# Altium PCB JacdacBrainESP32 48.PcbDoc (part 1 of 3)
Units mm, origin at the board's own origin, x right, y up, seen from the top; angles counter-clockwise.
Board outline 34 x 42.68 mm, 2 copper layers (Top Layer, Bottom Layer), stack 1.525 mm thick; 80 components, 57 nets, 295 pads, 72 vias.
Unrouted connection lines stored in the file: 49.
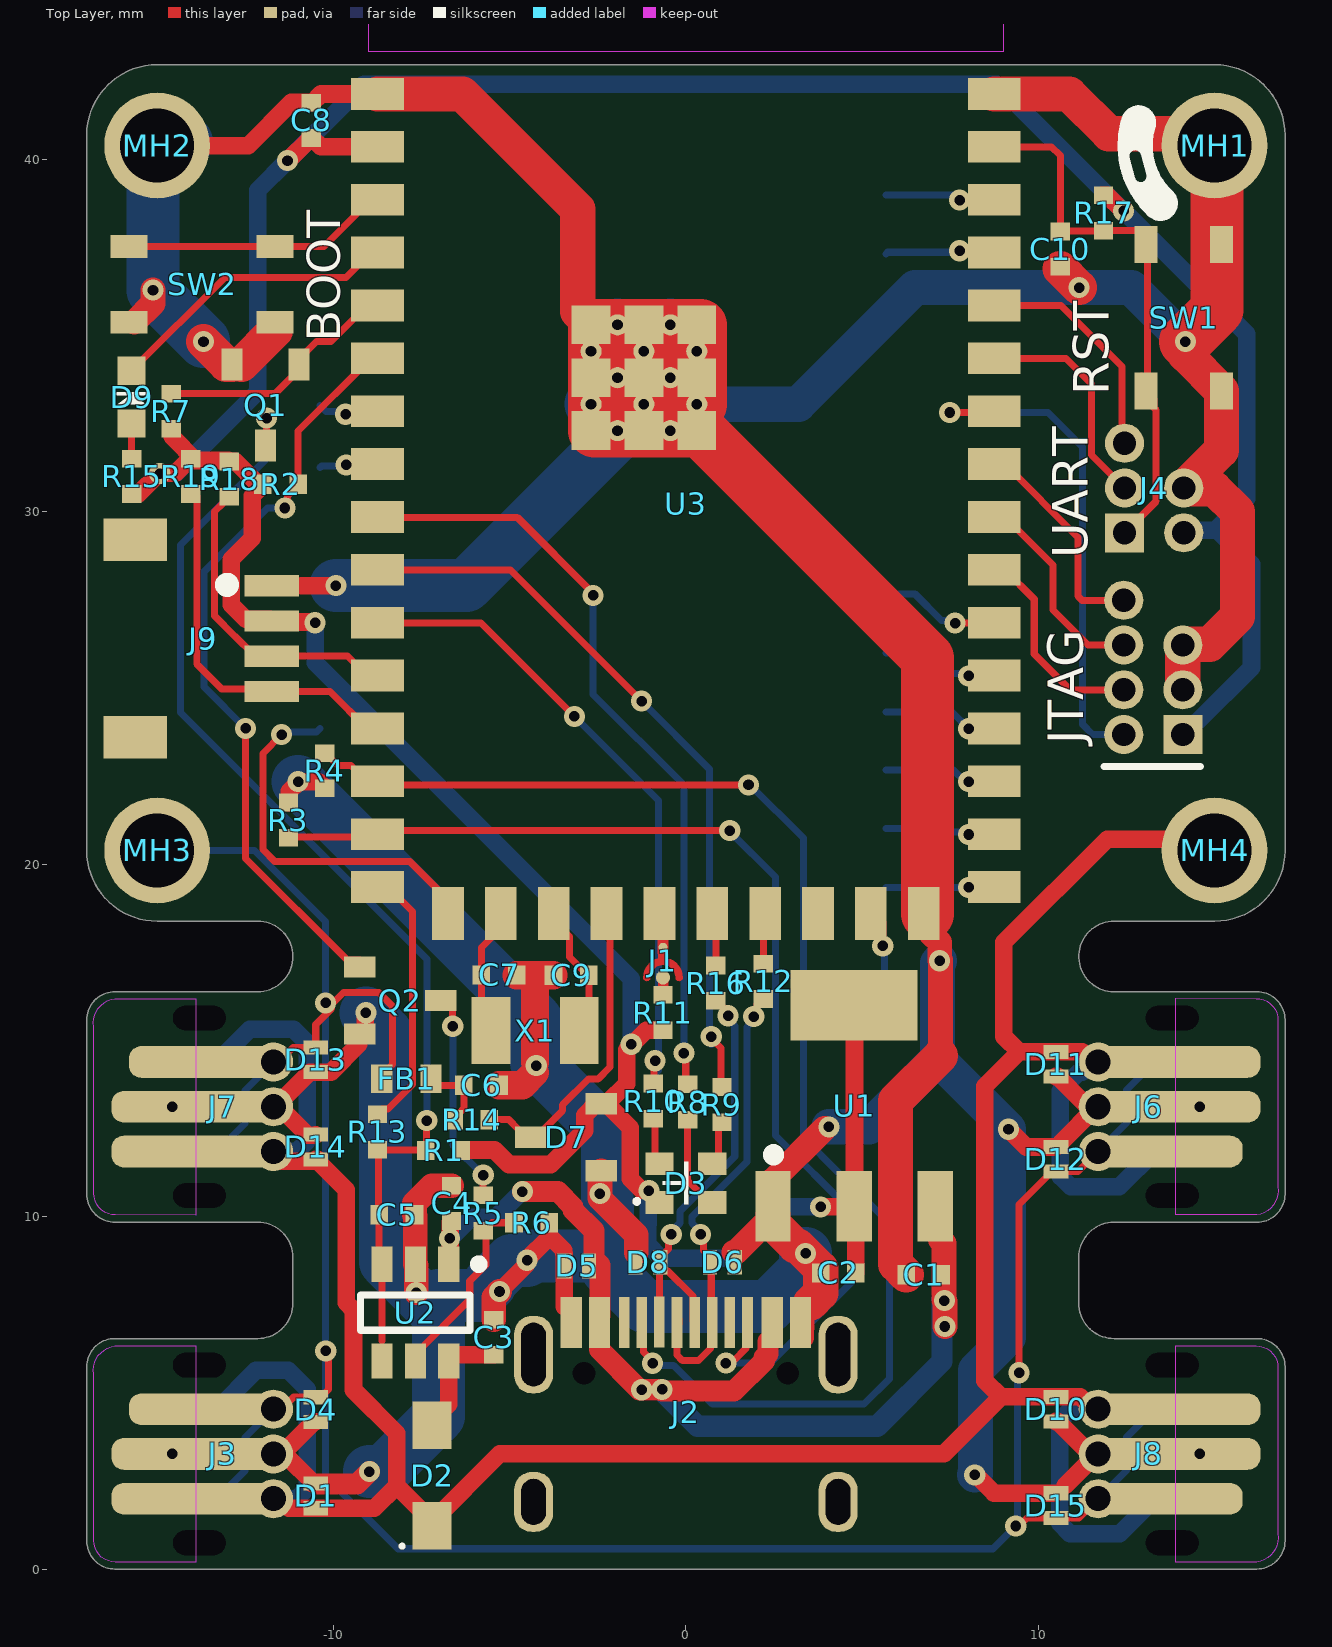
[diagram p0: Top Layer view]
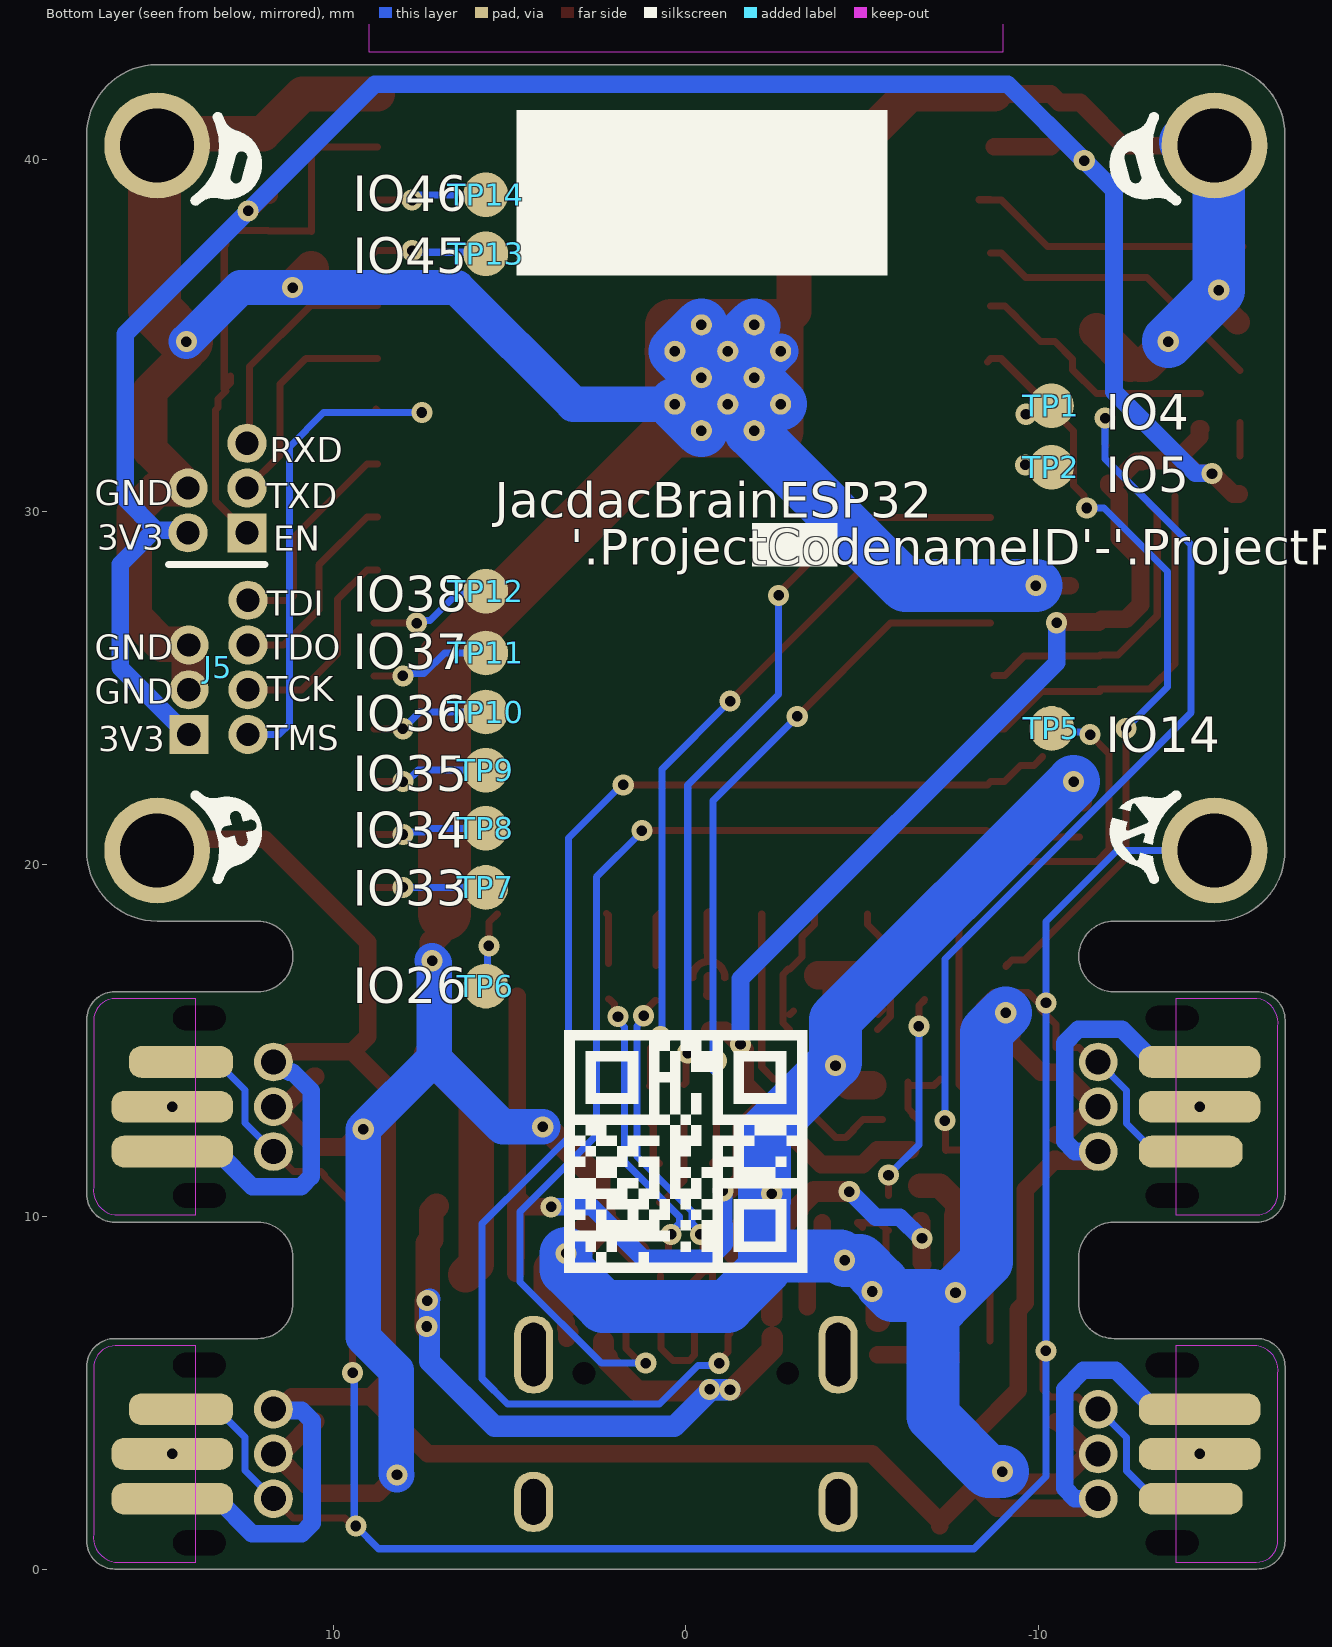
[diagram p1: Bottom Layer view, seen from below]

## Layer stack, top to bottom
Top Solder: solder mask 0.0102, Solder Resist, Dk 3.5
Top Layer: signal copper 0.0356
Dielectric 1: core 1.454, FR-4, Dk 4.2
Bottom Layer: signal copper 0.0356
Bottom Solder: solder mask 0.0102, Solder Resist, Dk 3.5

## Board outline
-17,0.8 ccw(c-16.201,0.799) -16.198,0 16.198,0 ccw(c16.199,0.801) 17,0.8 17,5.74 ccw(c16.199,5.739) 16.198,6.54 12.148,6.54 cw(c12.149,7.54) 11.148,7.541 11.148,8.84 cw(c12.149,8.84) 12.148,9.84 16.198,9.84 ccw(c16.199,10.641) 17,10.64 17,15.58 ccw(c16.199,15.579) 16.198,16.38 12.148,16.38 cw(c12.149,17.38) 12.15,18.381 15,18.381 ccw(c14.997,20.383) 17,20.381 17,40.682 ccw(c14.999,40.681) 15,42.682 15,42.681 -14.998,42.681 -14.998,42.682 ccw(c-14.998,40.681) -16.999,40.682 -16.999,40.681 -16.998,22.052 -16.997,20.381 ccw(c-14.998,20.38) -14.998,18.381 -12.148,18.381 cw(c-12.15,17.38) -12.148,16.38 -16.198,16.38 ccw(c-16.201,15.581) -17,15.58 -17,10.64 ccw(c-16.201,10.639) -16.198,9.84 -12.148,9.84 cw(c-12.149,8.84) -11.148,8.84 -11.148,7.541 cw(c-12.149,7.54) -12.148,6.54 -16.198,6.54 ccw(c-16.201,5.741) -17,5.74

## Design rules (kind name [scope] priority, off if disabled: settings)
AssemblyTestPointUsage [All] p1: valid=2
BoardOutlineClearance [All] p1: gap=0.3 ignorepadtopadclearanceinfootprint=FALSE except(0: Arc-SplitContinuation Track-SplitContinuation SMDPad-SplitContinuation THPad-SplitContinuation Via-SplitContinuation Fill-SplitContinuation Poly-SplitContinuation Region-OutlineEdge Region-SplitContinuation Text-OutlineEdge Text-SplitContinuation; 0.25: THPad-OutlineEdge Poly-OutlineEdge)
Clearance [All] p1: gap=0.125 ignorepadtopadclearanceinfootprint=FALSE except(0: Arc-Hole Track-Hole SMDPad-Hole THPad-Hole Via-Hole Fill-Hole Poly-Hole Region-Hole Text-Hole)
ComponentClearance SpecialComponentClearance [InComponent('MH1') or InComponent('MH2')  or InComponent('MH3')  or InComponent('MH4') vs InComponent('J3') or InComponent('J4')  or InComponent('J6')  or InComponent('J7') or InComponent('J2') or InComponent('MH2') or InComponent('J1')] p1: gap=0 collisioncheckmode=3 verticalgap=0 showdistances=FALSE
ComponentClearance [All] p2: gap=0.2 collisioncheckmode=3 verticalgap=0.2 showdistances=FALSE
DiffPairsRouting [All] p1: maxlimit=2 minlimit=0.15 mostfreqgap=0.15 toplayer_minwidth=0.15 toplayer_maxwidth=2 toplayer_prefwidth=0.15 bottomlayer_minwidth=0.15 bottomlayer_maxwidth=2 bottomlayer_prefwidth=0.15 substack1={CB9D278B-8BF5-444A-AAF4-837A2A9DF42D} toplayer_{cb9d278b-8bf5-444a-aaf4-837a2a9df42d}_minwidth=0.381 toplayer_{cb9d278b-8bf5-444a-aaf4-837a2a9df42d}_maxwidth=0.381 toplayer_{cb9d278b-8bf5-444a-aaf4-837a2a9df42d}_prefwidth=0.381 bottomlayer_{cb9d278b-8bf5-444a-aaf4-837a2a9df42d}_minwidth=0.381 bottomlayer_{cb9d278b-8bf5-444a-aaf4-837a2a9df42d}_maxwidth=0.381 bottomlayer_{cb9d278b-8bf5-444a-aaf4-837a2a9df42d}_prefwidth=0.381 substack2={826B8647-A721-4255-895A-19F9591B9CD1} toplayer_{826b8647-a721-4255-895a-19f9591b9cd1}_minwidth=0.381 toplayer_{826b8647-a721-4255-895a-19f9591b9cd1}_maxwidth=0.381 toplayer_{826b8647-a721-4255-895a-19f9591b9cd1}_prefwidth=0.381 bottomlayer_{826b8647-a721-4255-895a-19f9591b9cd1}_minwidth=0.381 bottomlayer_{826b8647-a721-4255-895a-19f9591b9cd1}_maxwidth=0.381 bottomlayer_{826b8647-a721-4255-895a-19f9591b9cd1}_prefwidth=0.381 substack3={E64FCAF4-1BC8-437D-B1E0-0E5F2DC0F59E} toplayer_{e64fcaf4-1bc8-437d-b1e0-0e5f2dc0f59e}_minwidth=0.381 toplayer_{e64fcaf4-1bc8-437d-b1e0-0e5f2dc0f59e}_maxwidth=0.381 toplayer_{e64fcaf4-1bc8-437d-b1e0-0e5f2dc0f59e}_prefwidth=0.381 bottomlayer_{e64fcaf4-1bc8-437d-b1e0-0e5f2dc0f59e}_minwidth=0.381 bottomlayer_{e64fcaf4-1bc8-437d-b1e0-0e5f2dc0f59e}_maxwidth=0.381 bottomlayer_{e64fcaf4-1bc8-437d-b1e0-0e5f2dc0f59e}_prefwidth=0.381 substack4={E61CE66C-507C-4E1E-8E83-C905434AFC1C} toplayer_{e61ce66c-507c-4e1e-8e83-c905434afc1c}_minwidth=0.381 toplayer_{e61ce66c-507c-4e1e-8e83-c905434afc1c}_maxwidth=0.381 toplayer_{e61ce66c-507c-4e1e-8e83-c905434afc1c}_prefwidth=0.381 bottomlayer_{e61ce66c-507c-4e1e-8e83-c905434afc1c}_minwidth=0.381 bottomlayer_{e61ce66c-507c-4e1e-8e83-c905434afc1c}_maxwidth=0.381 bottomlayer_{e61ce66c-507c-4e1e-8e83-c905434afc1c}_prefwidth=0.381 maxuncoupledlength=25
FabricationTestPointUsage [All] p1: valid=2 allowmultiple=FALSE
HoleSize [All] p1: absolutevalues=TRUE maxlimit=2.54 minlimit=0.2 maxpercent=80.000 minpercent=20.000
MinimumSolderMaskSliver [All] p1: minsoldermaskwidth=0.005
PlaneClearance [All] p1: clearance=0.3
PlaneConnect [All] p1: planeconnectstyle=Relief reliefexpansion=0.5 reliefentries=4 reliefconductorwidth=0.2 reliefairgap=0.3
PolygonConnect "PolygonConnect GND" [isVIA] p1: connectstyle=Relief reliefconductorwidth=0.2 reliefentries=4 polygonreliefangle="90 Angle" airgapwidth=0.2
PolygonConnect [All] p2: connectstyle=Relief reliefconductorwidth=0.2 reliefentries=4 polygonreliefangle="90 Angle" airgapwidth=0.2
RoutingVias [All] p1: holewidth=0.3 width=0.6 viastyle="Through Hole" minholewidth=0.3 minwidth=0.6 maxholewidth=0.3 maxwidth=0.8
SilkToSilkClearance [All] p1: silktosilkclearance=0.001
SilkToSolderMaskClearance [IsPad] p1: minsilkscreentomaskgap=0.05 clearancetoexposedcopper=TRUE
SolderMaskExpansion [All] p1: expansion=0.075 istentingtop=FALSE
Width [All] p1: maxlimit=2 minlimit=0.15 preferedwidth=0.15 substack1={CB9D278B-8BF5-444A-AAF4-837A2A9DF42D} substack2={826B8647-A721-4255-895A-19F9591B9CD1} substack3={E64FCAF4-1BC8-437D-B1E0-0E5F2DC0F59E} substack4={E61CE66C-507C-4E1E-8E83-C905434AFC1C} minimp=50.000000 maximp=50.000000 favimp=50.000000
20 further rules are at their usual default settings.

## Classes and differential pairs
differential pair USB_R: +USB_R_P -USB_R_N
differential pair USB: +USB_P -USB_N

## Components (designator, comment, footprint, x,y, rotation, side; value= is the part's Value field where it differs from the comment)
C1 "CL05A475MP5NRNC" "R0402 - WITHOUT OUTLINE" 6.75,8.35 r0 top
C2 "CL05A475MP5NRNC" "R0402 - WITHOUT OUTLINE" 4.325,8.4 r0 top
C3 "CL05A475MP5NRNC" "R0402 - WITHOUT OUTLINE" -5.45,6.575 r270 top
C4 "CL05A475MP5NRNC" "R0402 - WITHOUT OUTLINE" -6.649,10.375 r270 top
C5 "CL05A475MP5NRNC" "R0402 - WITHOUT OUTLINE" -8.2,10.05 r180 top
C6 "CL05C330JB5NNNC" "C0402_0.55MM - without outline" -5.8,13.725 r180 top
C7 "CL05C150JB5NNNC" "C0402_0.55MM - without outline" -5.3,16.854 r180 top
C8 "CL05B104KP5NNNC" "C0402_0.55MM - without outline" -10.625,41.1 r270 top
C9 "CL05C150JB5NNNC" "C0402_0.55MM - without outline" -3.254,16.845 r0 top
C10 "CL05A105KP5NNNC" "C0402_0.55MM - without outline" 10.625,37.45 r90 top
D1 "RCLAMP0521P-N" "TVS 0402 - L" -10.5,2.075 r90 top
D2 "RB161MM-20TR" SOD-123F -7.2,2.65 r90 top
D2 "MBR120VLSFT3G" MBR120VLSFT3G -7.2,2.65 r90 top
D3 "TZ-P4-1615RGBTCA1-0.55T" TZ-P4-1615RGBTCA1-0.55T 0,10.95 r0 top
D4 "RCLAMP0521P-N" "TVS 0402 - L" -10.5,4.525 r270 top
D5 "RCLAMP0521P-N" "TVS 0402 - L" -3.1,8.6 r180 top
D6 "RCLAMP0521P-N" "TVS 0402 - L" 1.037,8.7 r0 top
D7 "BAT54S" "NXP-BAT54S-TO-236AB - without outline" -3.4,12.25 r180 top
D8 "RCLAMP0521P-N" "TVS 0402 - L" -1.075,8.7 r180 top
D9 "Everlight Elec'''" "0603 Green" -15.725,33.25 r270 top
D10 "RCLAMP0521P-N" "TVS 0402 - L" 10.5,4.535 r270 top
D11 "RCLAMP0521P-N" "TVS 0402 - L" 10.5,14.325 r270 top
D12 "RCLAMP0521P-N" "TVS 0402 - L" 10.5,11.625 r90 top
D13 "RCLAMP0521P-N" "TVS 0402 - L" -10.5,14.45 r270 top
D14 "RCLAMP0521P-N" "TVS 0402 - L" -10.5,11.975 r90 top
D15 "RCLAMP0521P-N" "TVS 0402 - L" 10.5,1.8 r90 top
FB1 "TDK MPZ1608S102ATA00" "TDK MPZ1608 0.8mm - without outline" -7.927,13.909 r0 top
J1 "OpenSolderBlob" SolderBlobA -0.649,17.166 r270 top
J2 "TYPE-C-31-M-12" TYPE-C-31-M-12 0,7 r0 top locked
J3 "3 pin jacdac edge connector" JACDAC_EDGE_CONNECTOR_NO_TRACES -11.15,3.265 r90 top
J4 "Uart Hack Connect Mini 1.27 mm pitch 2-row" UART_HACK_CONNECT_MINI_5_X_1_27 12.449,29.4 r0 top
J5 "7pin Jtag Hack Connect Mini 1.27 mm pitch 2-row" JTAG_HACK_CONNECT_MINI_5_X_1_27 14.1,23.675 r180 bottom
J6 "3 pin jacdac edge connector" JACDAC_EDGE_CONNECTOR_NO_TRACES 11.15,13.116 r270 top
J7 "3 pin jacdac edge connector" JACDAC_EDGE_CONNECTOR_NO_TRACES -11.15,13.116 r90 top
J8 "3 pin jacdac edge connector" JACDAC_EDGE_CONNECTOR_NO_TRACES 11.15,3.265 r270 top
J9 "A1001WR-S-04P" A1001WR-S-04P -11.75,26.4 r270 top
J9 "SM04B-SRSS-TB(LF)(SN)" SM04B-SRSS-TB(LF)(SN) -11.75,26.4 r270 top
MH1 "MH_5.0MMK_3.0MMC_2.1MMD_PTH" MH_5.0MMK_3.0MMC_2.1MMD_PTH 15,40.387 r0 top
MH2 "MH_5.0MMK_3.0MMC_2.1MMD_PTH" MH_5.0MMK_3.0MMC_2.1MMD_PTH -15,40.387 r180 top
MH3 "MH_5.0MMK_3.0MMC_2.1MMD_PTH" MH_5.0MMK_3.0MMC_2.1MMD_PTH -15,20.387 r90 top
MH4 "MH_5.0MMK_3.0MMC_2.1MMD_PTH" MH_5.0MMK_3.0MMC_2.1MMD_PTH 15,20.387 r0 top
Q1 "2N7002K-T1-GE3" "SOT-23-3 (TO-236)" -11.925,33.025 r270 top
Q2 "2N7002K-T1-GE3" "SOT-23-3 (TO-236)" -8.102,16.128 r0 top
R1 "RC0402FR-07330KL" "R0402 - WITHOUT OUTLINE" -6.875,11.875 r180 top
R2 "" "R0402 - WITHOUT OUTLINE" -11.5,30.775 r0 top
R3 "RC0402JR-075K1L" "R0402 - WITHOUT OUTLINE" -11.275,21.25 r90 top
R4 "RC0402JR-075K1L" "R0402 - WITHOUT OUTLINE" -10.25,22.65 r270 top
R5 "RT0402FRE0768KL" "R0402 - WITHOUT OUTLINE" -5.75,10.1 r270 top
R6 "RC0402FR-0752K3L" "R0402 - WITHOUT OUTLINE" -4.375,9.825 r180 top
R7 "" "R0402 - WITHOUT OUTLINE" -14.6,32.85 r90 top
R8 "0402WGF300JTCE" "R0402 - WITHOUT OUTLINE" 0.05,13.25 r90 top
R9 "0402WGF300JTCE" "R0402 - WITHOUT OUTLINE" 1.025,13.175 r90 top
R10 "RC0402FR-07150RL" "R0402 - WITHOUT OUTLINE" -0.925,13.275 r90 top
R11 "10k" "R0402 - WITHOUT OUTLINE" -0.649,15.79 r90 top
R12 "RC0402JR-070RL" "R0402 - WITHOUT OUTLINE" 2.2,16.675 r90 top
R13 "RC0402FR-07150RL" "R0402 - WITHOUT OUTLINE" -8.75,12.4 r270 top
R14 "RC0402FR-07220RL" "R0402 - WITHOUT OUTLINE" -6.075,12.75 r180 top
R15 "RC0402FR-07150RL" "R0402 - WITHOUT OUTLINE" -15.725,31 r270 top
R16 "RC0402JR-070RL" "R0402 - WITHOUT OUTLINE" 0.85,16.625 r90 top
R17 "10k" "R0402 - WITHOUT OUTLINE" 11.85,38.475 r270 top
R18 "RC0402FR-072K2L" "R0402 - WITHOUT OUTLINE" -12.95,30.925 r270 top
R19 "RC0402FR-072K2L" "R0402 - WITHOUT OUTLINE" -14.05,31 r270 top
SW1 "PTS810SJG250SMTRLFS" PTS810 14.125,35.5 r270 top
SW2 "PTS810SJG250SMTRLFS" PTS810 -13.725,36.45 r180 top
TP1 "TestPoint" Pad1.27mm#1 -10.374,33.007 r0 bottom
TP2 "TestPoint" Pad1.27mm#1 -10.374,31.259 r0 bottom
TP5 "TestPoint" Pad1.27mm#2 -10.374,23.85 r0 bottom
TP6 "TestPoint" Pad1.27mm#1 5.676,16.54 r0 bottom
TP7 "TestPoint" Pad1.27mm#1 5.676,19.34 r0 bottom
TP8 "TestPoint" Pad1.27mm#1 5.676,21.017 r0 bottom
TP9 "TestPoint" Pad1.27mm#1 5.676,22.665 r0 bottom
TP10 "TestPoint" Pad1.27mm#1 5.676,24.315 r0 bottom
TP11 "TestPoint" Pad1.27mm#1 5.676,25.99 r0 bottom
TP12 "TestPoint" Pad1.27mm#1 5.676,27.74 r0 bottom
TP13 "TestPoint" Pad1.27mm#1 5.676,37.315 r0 bottom
TP14 "TestPoint" Pad1.27mm#1 5.676,38.99 r0 bottom
U1 "BL9110-330BPFB" SOT-223- 4.775,13.15 r90 top
U2 "TPS2553DBVR" TI-TPS2553 -7.675,7.275 r270 top
U3 "ESP32-S2-WROOM" ESP32-S2-WROOM 0,33.85 r0 top
X1 "ECS-.327-12.5-34S-TR" CRYSTAL-SMD-3.2X1.5 -4.275,15.275 r0 top

## Footprints (in the part's own frame and the unit in brackets; to place one, negate y for a bottom-side part, rotate by r counter-clockwise, add the part's x,y. Pads: shape width x height; smd on the part's side, far side on the other; paste and mask are expansions set on the pad)
"0603 Green" [mm]
  rect 0.8x0.8 smd paste-0.05: 1(-0.75,0) 2(0.75,0)
  silkscreen extent -0.1,-0.4 0.2,0.4, body extent -0.79,-0.4 0.81,0.4, height 0.4
A1001WR-S-04P [mm] "Connector Header Surface Mount, Right Angle 4 position 0.039\" (1.00mm)"
  rect 0.6x1.55 smd: 1(-1.5,0) 2(-0.5,0) 3(0.5,0) 4(1.5,0)
  rect 1.2x1.8 smd: M1(-2.8,-3.875) M2(2.8,-3.875)
  silkscreen extent -1.67,-1.41 -1.38,-1.13, body extent -3,-4.53 3,0.42, height 2.86
"C0402_0.55MM - without outline" [mm]
  rect 0.5x0.55 smd: 1(-0.5,0) 2(0.5,0)
  body extent -0.5,-0.25 0.5,0.25, height 0.55
CRYSTAL-SMD-3.2X1.5 [mm] "3.20mm x 1.50mm"
  rect 1.1x1.9 smd: 1(-1.25,0) 2(1.25,0)
  body extent -1.6,-0.77 1.6,0.72, height 0.9
ESP32-S2-WROOM [mm] "18x31x3.3 WiFi Modules RoHS"
  rect 1.5x0.9 smd: 1(-8.75,8) 2(-8.75,6.5) 3(-8.75,5) 4(-8.75,3.5) 5(-8.75,2) 6(-8.75,0.5) 7(-8.75,-1) 8(-8.75,-2.5) 9(-8.75,-4) 10(-8.75,-5.5) 11(-8.75,-7) 12(-8.75,-8.5) 13(-8.75,-10) 14(-8.75,-11.5) 15(-8.75,-13) 16(-8.75,-14.5) 27(8.75,-14.5) 28(8.75,-13) 29(8.75,-11.5) 30(8.75,-10) 31(8.75,-8.5) 32(8.75,-7) 33(8.75,-5.5) 34(8.75,-4) 35(8.75,-2.5) 36(8.75,-1) 37(8.75,0.5) 38(8.75,2) 39(8.75,3.5) 40(8.75,5) 41(8.75,6.5) 42(8.75,8)
  rect 0.9x1.5 smd: 17(-6.75,-15.25) 18(-5.25,-15.25) 19(-3.75,-15.25) 20(-2.25,-15.25) 21(-0.75,-15.25) 22(0.75,-15.25) 23(2.25,-15.25) 24(3.75,-15.25) 25(5.25,-15.25) 26(6.75,-15.25)
  rect 1.1x1.1 smd: 43(-2.69,-1.55) 43(-2.69,-0.05) 43(-2.69,1.45) 43(-1.19,-1.55) 43(-1.19,-0.05) 43(-1.19,1.45) 43(0.31,-1.55) 43(0.31,-0.05) 43(0.31,1.45)
  round 0.6 hole 0.3: 43(-2.69,-0.8) 43(-2.69,0.7) 43(-1.94,-1.55) 43(-1.94,-0.05) 43(-1.94,1.45) 43(-1.19,-0.8) 43(-1.19,0.7) 43(-0.44,-1.55) 43(-0.44,-0.05) 43(-0.44,1.45) 43(0.31,-0.8) 43(0.31,0.7)
  Keep-Out Layer region: 9,9.2 -9,9.2 -9,15.5 9,15.5
  Keep-Out Layer region: 9,9.2 -9,9.2 -9,15.5 9,15.5
  Keep-Out Layer region: 9,9.2 -9,9.2 -9,15.5 9,15.5
  body extent -9.02,-15.5 8.97,15.5, height 3.3
JACDAC_EDGE_CONNECTOR_NO_TRACES [mm] "JacDac 3 pin connector with no traces"
  rrect78% 0.9x2.95 smd far side paste-1 mask+0: 1(-1.27,3.175)
  rrect78% 0.9x4.3 smd paste-1 mask+0: 1(1.27,2.5)
  round 1.11 / inner round 0.71 / far side round 1.1 hole 0.71 paste-0.254 mask+0: 1(1.27,0.55) 2(0,0.55) 3(-1.27,0.55)
  rrect78% 0.9x3.45 smd far side paste-1 mask+0: 2(0,3.425) 3(1.27,3.425)
  rrect78% 0.9x4.8 smd paste-1 mask+0: 2(0,2.75) 3(-1.27,2.75)
  round 0 hole 0.7 slot 1.5 at 90 deg unplated: ""(-2.52,2.65) ""(2.52,2.65)
  Top Layer keep-out region: -3.075,2.75 -3.07,5.033 -2.987,5.341 -2.761,5.567 -2.453,5.65 -2.453,5.65 2.27,5.65 2.545,5.635 2.794,5.516 2.978,5.31 3.07,5.05 3.07,5.05 3.07,2.75
  Bottom Layer lines w0.2: -1.27,0.85 -1.126,0.85
  Bottom Layer keep-out region: -3.07,2.75 -3.07,5.033 -3.023,5.269 -2.889,5.469 -2.689,5.603 -2.453,5.65 -2.453,5.65 2.27,5.65 2.545,5.635 2.794,5.516 2.978,5.31 3.07,5.05 3.07,5.05 3.07,2.75
JTAG_HACK_CONNECT_MINI_5_X_1_27 [mm]
  rect 1.11x1.11 hole 0.66: 1(0,0)
  round 1.11 hole 0.66: 2(1.676,0) 3(0,1.27) 4(1.676,1.27) 5(0,2.54) 6(1.676,2.54) 8(1.676,3.81)
MBR120VLSFT3G [mm] "SODFL, 2-Leads, Body 1.65x3.60mm, IPC Medium Density"
  rect 1.35x1.1 smd: 1(-1.425,0) 2(1.425,0)
  silkscreen extent -2.05,0.8 -1.95,0.9, body extent -1.73,-0.82 1.72,0.82, height 0.95
MH_5.0MMK_3.0MMC_2.1MMD_PTH [mm] "Mounting Hole 5.0mm clearance, 3.1 annualar ring and 2.1mm PTH"
  round 3 hole 2.1 mask+0.05: 1(0,0)
"NXP-BAT54S-TO-236AB - without outline" [mm] "SOT23, 3-Leads, Body 2.90x2.30mm, Pitch 0.95mm, IPC Medium Density"
  rect 0.9x0.6 smd: 1(-1,0.95) 2(-1,-0.95) 3(1,0)
  body extent -1.32,-1.5 1.32,1.5, height 1.12
Pad1.27mm#1 [mm] "1.27mm dia round pad"
  round 1.27 smd paste-2.54: 1(0,0)
Pad1.27mm#2 [mm] "1.27mm dia round pad"
  round 1.27 smd paste-2.54: 1(-0.008,0)
PTS810 [mm] "4.20mm x 3.20mm"
  rect 1.05x0.65 smd: 1(-2.075,1.075) 2(2.075,1.075) 3(-2.075,-1.075) 4(2.075,-1.075)
  body extent -2.29,-1.6 2.29,1.6, height 2.5
"R0402 - WITHOUT OUTLINE" [mm]
  rect 0.5x0.55 smd: 1(-0.5,0) 2(0.5,0)
  body extent -0.5,-0.25 0.5,0.25, height 0.35
SM04B-SRSS-TB(LF)(SN) [mm] "Connector Header Surface Mount, Right Angle 4 position 0.039\" (1.00mm)"
  rect 0.6x1.55 smd: 1(-1.5,0) 2(-0.5,0) 3(0.5,0) 4(1.5,0)
  rect 1.2x1.8 smd: M1(-2.8,-3.875) M2(2.8,-3.875)
  silkscreen extent -1.67,-1.41 -1.38,-1.13, body extent -3,-4.53 3,0.42, height 2.86
SOD-123F [mm] "SODFL, 2-Leads, Body 1.65x3.60mm, IPC Medium Density"
  rect 1.35x1.1 smd: 1(-1.425,0) 2(1.425,0)
  silkscreen extent -2.05,0.8 -1.95,0.9, body extent -1.73,-0.82 1.72,0.82, height 0.95
SolderBlobA [mil] "open solder blob, 'ball and socket' style"
  round 16 smd paste-10: 1(15,0)
  round 1 smd paste-10 mask-1: 2(-22.01,0) 2(-18.47,-3.55) 2(-18.47,3.55)
  oval 10x10.01 smd paste-10 mask-2: 2(-18.65,0.03)
  Top Layer region: -17,-3.84 -18.47,-3.55 -19.72,-2.72 -20.55,-1.47 -20.84,0 -20.84,0 -20.55,1.47 -19.72,2.72 -18.47,3.55 -17,3.84 -17,3.84 -15.53,3.55 -14.28,2.72 -13.45,1.47 -13.16,0 -13.16,0 -13.45,-1.47 -14.28,-2.72 -15.53,-3.55 -17,-3.84
  Top Layer region: -17,-5.02 -19.18,-4.52 -20.92,-3.13 -21.89,-1.12 -21.89,1.12 -20.92,3.13 -19.18,4.52 -17,5.01 -17,5.01 -6.44,5.01 -2.16,13.79 5.48,19.85 15,22.01 15,22.01 16.54,21.71 17.84,20.84 18.71,19.54 19.01,18 19.01,18 18.71,16.46 17.84,15.16 16.54,14.29 15,13.99 15,13.98 9.65,12.92 5.11,9.89 2.08,5.35 1.01,0 1.01,0 2.08,-5.35 5.11,-9.89 9.65,-12.92 15,-13.99 15,-13.99 16.54,-14.29 17.84,-15.16 18.71,-16.46 19.01,-18 19.01,-18 18.71,-19.54 17.84,-20.84 16.54,-21.71 15,-22.01 15,-22.02 5.48,-19.85 -2.16,-13.79 -6.44,-5.02 -6.44,-5.02
"SOT-23-3 (TO-236)" [mm] "SOT23, 3-Leads, Body 2.90x2.30mm, Pitch 0.95mm, IPC Medium Density"
  rect 0.9x0.6 smd: 1(-1.15,0.95) 2(-1.15,-0.95) 3(1.15,0)
  body extent -1.32,-1.5 1.32,1.5, height 1.12
SOT-223- [mm] "1A Low Dropout, Low Quiescent Current"
  rect 2x1 smd: 1(-2.85,2.3) 2(-2.85,0) 3(-2.85,-2.3)
  rect 2x3.6 smd: 2(2.85,0)
  silkscreen extent -1.45,2.24 -1.35,2.34, body extent -3.43,-3.25 3.43,3.25, height 1.71
"TDK MPZ1608 0.8mm - without outline" [mm]
  rect 0.6x0.8 smd paste-0.1: 1(-0.7,0) 2(0.7,0)
  body extent -0.8,-0.4 0.8,0.4, height 0.8
TI-TPS2553 [mm] "SOT23, 6-Leads, Body 2.90x2.80mm, Pitch 0.95mm, IPC Medium Density"
  rect 1x0.6 smd: 1(-1.375,0.95) 2(-1.375,0) 3(-1.375,-0.95) 4(1.375,-0.95) 5(1.375,0) 6(1.375,0.95)
  silkscreen extent -1.5,-1.55 0.5,1.93, body extent -1.52,-1.52 1.53,1.53, height 1.1
"TVS 0402 - L" [mm] "TVS 0402 RoHS"
  rect 0.4x0.7 smd paste-0.038 mask+0.05: 1(-0.35,0) 2(0.35,0)
  body extent -0.5,-0.3 0.5,0.3, height 0.5
TYPE-C-31-M-12 [mm] "USB - Type C Female 16 8.94*7.3mm USB Connectors RoHS"
  rrect90% 1.1x2.2 hole 0.7 slot 1.8 at 90 deg: 1(-4.32,-0.915) 4(4.32,-0.915)
  rrect90% 0x0 hole 0.65 unplated: 1(-2.89,-1.445)
  round 0 hole 0.65 unplated: 1(2.89,-1.445)
  rrect90% 1.1x1.7 hole 0.7 slot 1.3 at 90 deg: 2(-4.32,-5.095) 3(4.32,-5.095)
  rect 0.3x1.45 smd paste-0.254 mask+0.05: A1(-3.4,0)
  rect 0.3x1.45 smd mask+0.05: A4(-2.6,0) A5(-1.25,0) A6(-0.25,0) A7(0.25,0) A8(1.25,0) A9(2.6,0) A12(3.4,0) B1(3.1,0) B4(2.3,0) B5(1.75,0) B6(0.75,0) B7(-0.75,0.006) B8(-1.75,0) B9(-2.3,0) B12(-3.1,0)
  body extent -4.47,-7.7 4.47,0.21, height 3.31
TZ-P4-1615RGBTCA1-0.55T [mm] "1615 Light Emitting Diodes (LED) RoHS"
  rect 0.8x0.65 smd mask+0.05: 1(-0.75,-0.55) 2(-0.75,0.55) 3(0.75,0.55) 4(0.75,-0.55)
  silkscreen extent -1.44,-0.6 0.07,0.6, body extent -0.8,-0.75 0.8,0.75, height 0.55
UART_HACK_CONNECT_MINI_5_X_1_27 [mm]
  rect 1.11x1.11 hole 0.66: 1(0,0)
  round 1.11 hole 0.66: 2(1.676,0) 3(0,1.27) 4(1.676,1.27) 5(0,2.54)

## Part data
C1 C2 C3 C4 C5: "CAP CER 4.7UF 10V X5R 0402", Capacitance=4.7uF, Case Code (Imperial)=0402, Case Code (Metric)=1005, Dielectric=X5R, Manufacturer=Samsung, Max Operating Temperature=85°C, Min Operating Temperature=-55°C, Package Quantity=10000, Supplier Part Number 1=1276-1482-2-ND, Tolerance=20%, Voltage Rating=10V, Case/Package=0402, Category="Ceramic Capacitors", Checked By=?, ComponentLink1Description="Online datasheet", ComponentLink1URL=https://datasheet.ciiva.com/25786/cl05a475mp5nrnc-25786963.pdf, Created By="D. Gakure", Lead Free="Lead Free", Length=0.039inch, Manufacturer Part Number=CL05A475MP5NRNC, Mount="Surface Mount", Packaging="Tape and Reel", Pricing 1="10000=0.01405, 20000=0.01338 (USD)", Pricing 2="1=0.23500, 500=0.03970, 1500=0.02900, 2500=0.02500, 5000=0.02050 (USD)", RoHS=Yes, RoHS Compliant=Yes, Series=CL, Stock 1=840000, Stock 2=2004, Supplier 1=Digi-Key, Supplier 2="Future Electronics", Supplier Part Number 2=2103694, Thickness=0.022inch, Width=0.02inch
C6: "Cap Ceramic 33pF 50V C0G 5% SMD 0402 125C Paper T/R", Capacitance=33pF, Case Code (Imperial)=0402, Case Code (Metric)=1005, Dielectric=C0G, Manufacturer=Samsung, Max Operating Temperature=125°C, Min Operating Temperature=-55°C, Package Quantity=1, Supplier Part Number 1=1276-1272-1-ND, Temperature Coefficient=300ppm/°C, Tolerance=5%, Voltage=50V, Case/Package=0402, Category="Ceramic Capacitors", Construction=Flat, Contact Plating=Tin, Depth=0.5mm, Height=0.5mm, Lead Free="Lead Free", Length=1mm, Manufacturer Part Number=CL05C330JB5NNNC, Material=Ceramic, Mount="Surface Mount", Packaging="Tape and Reel", Pricing 1="1=0.10000, 10=0.02300, 50=0.01260, 100=0.01040, 500=0.00740, 1000=0.00582, 2500=0.00529, 5000=0.00487 (USD)", Radiation Hardening=No, RoHS=Yes, RoHS Compliant=Yes, Series=CL, Stock 1=5436288, Supplier 1=Digi-Key, Supplier 2=Farnell, Supplier 3=Mouser, Supplier Part Number 2=3013373, Supplier Part Number 3=187-CL05C330JB5NNNC, Thickness=0.022inch, Voltage Rating=50V, Voltage Rating (DC)=50V, Width=0.02inch
C7 C9: "CAP CER 15PF 50V C0G/NP0 0402", Capacitance=15pF, Case Code (Imperial)=0402, Case Code (Metric)=1005, Dielectric=C0G, Manufacturer=Samsung, Max Operating Temperature=125°C, Min Operating Temperature=-55°C, Package Quantity=1, Supplier Part Number 1=1276-1179-1-ND, Temperature Coefficient=300ppm/°C, Tolerance=5%, Voltage=50V, Case/Package=0402, Category="Ceramic Capacitors", ComponentLink1Description="Online datasheet", ComponentLink1URL=https://datasheet.ciiva.com/15195/getdatasheetpartid-497170-15195669.pdf, Construction=Flat, Contact Plating=Tin, Depth=0.5mm, Height=0.5mm, Length=1mm, Manufacturer Part Number=CL05C150JB5NNNC, Material=Ceramic, Mount="Surface Mount", Packaging="Tape and Reel", Pricing 1="1=0.10000, 10=0.02600, 50=0.01440, 100=0.01180, 500=0.00842, 1000=0.00661, 2500=0.00601, 5000=0.00553 (USD)", Pricing 2="1=0.10000, 10=0.01400, 50=0.01400, 100=0.01200, 1000=0.00700, 10000=0.00500 (USD)", Radiation Hardening=No, RoHS=Yes, RoHS Compliant=Yes, Series=CL, Stock 1=822355, Stock 2=313617, Supplier 1=Digi-Key, Supplier 2=Mouser, Supplier Part Number 2=187-CL05C150JB5NNNC, Thickness=0.022inch, Voltage Rating=50V, Width=0.02inch
C8: "CAP CER 0.1UF 10V X7R 0402", Capacitance=100nF, Case Code (Imperial)=0402, Case Code (Metric)=1005, Dielectric=X7R, Manufacturer=Samsung, Max Operating Temperature=125°C, Min Operating Temperature=-55°C, Package Quantity=1, Supplier Part Number 1=1276-1002-1-ND, Tolerance=10%, Voltage Rating=10V, Case/Package=0402, Category="Ceramic Capacitors", Checked=?, ComponentLink1Description="Samsung datasheet online", ComponentLink1URL=https://datasheet.ciiva.com/15165/getdatasheetpartid-37100-15165107.pdf, Contact Plating=Tin, Created=DG, Depth=0.5mm, Height=0.5mm, Length=1mm, Manufacturer Part Number=CL05B104KP5NNNC, Mount="Surface Mount", Packaging="Tape and Reel", Pricing 1="1=0.10000, 10=0.02500, 50=0.01380, 100=0.01130, 500=0.00804, 1000=0.00632, 2500=0.00575, 5000=0.00529 (USD)", Pricing 2="10000=0.00400, 20000=0.00400, 50000=0.00400 (USD)", Pricing 3="10=0.01620, 100=0.01310, 500=0.00740, 2500=0.00600, 5000=0.00470, 10000=0.00400, 50000=0.00320 (GBP)", Pricing 4="1=0.09000, 25=0.02300, 100=0.01000, 250=0.00900, 500=0.00700, 1000=0.00500, 2500=0.00500 (USD)", Pricing 5="1=0.00460, 500=0.00340, 1500=0.00320, 2500=0.00310, 5000=0.00300 (USD)", Radiation Hardening=No, RoHS=Yes, Stock 1=17321183, Stock 2=984124, Stock 3=39022, Stock 4=56730, Stock 5=20877033, Supplier 1=Digi-Key, Supplier 2=Mouser, Supplier 3=Farnell, Supplier 4=Newark, Supplier 5="Future Electronics", Supplier Part Number 2=187-CL05B104KP5NNNC, Supplier Part Number 3=3013351, Supplier Part Number 4=82AC9219, Supplier Part Number 5=9032525, Thickness=0.022inch, Width=0.02inch
C10: "CAP CER 1UF 10V X5R 0402", Capacitance=1µF, Case Code (Imperial)=0402, Case Code (Metric)=1005, Dielectric=X5R, Manufacturer=Samsung, Max Operating Temperature=85°C, Min Operating Temperature=-55°C, Package Quantity=1, Supplier Part Number 1=1276-1076-1-ND, Tolerance=10%, Voltage Rating=10V, Case/Package=0402, Category=Capacitors, Checked=?, ComponentLink1Description="Online datasheet", ComponentLink1URL=https://datasheet.ciiva.com/15195/getdatasheetpartid-358390-15195630.pdf, Contact Plating=Tin, Created=DG, Depth=0.5mm, Height=0.5mm, Length=1mm, Manufacturer Part Number=CL05A105KP5NNNC, Material=Ceramic, Mount="Surface Mount", Packaging="Tape and Reel", Pricing 1="1=0.10000, 10=0.03900, 50=0.02100, 100=0.01720, 500=0.01228, 1000=0.00965, 2500=0.00877, 5000=0.00807 (USD)", Pricing 2="1=0.10000, 10=0.04200, 100=0.01800, 500=0.01300, 1000=0.01000, 2500=0.00900 (USD)", Pricing 3="10=0.02450, 100=0.02000, 500=0.01310, 2500=0.00920, 5000=0.00810, 10000=0.00640, 50000=0.00490 (GBP)", Radiation Hardening=No, RoHS=Yes, Stock 1=5705569, Stock 2=928941, Stock 3=53670, Supplier 1=Digi-Key, Supplier 2=Mouser, Supplier 3=Farnell, Supplier Part Number 2=187-CL05A105KP5NNNC, Supplier Part Number 3=3013329, Thickness=0.022inch, Width=0.02inch
D1 D4 D5 D6 D8 D10 D11 D12 D13 D14 D15: "Bidirectional 5V (Max) 6V 16V 3.5A (8/20us) 0402 TVS RoHS", Manufacturer="Born Semiconductor", Package=0402, Supplier1 Part Number=C316043, Checked By=?, ComponentLink1Description="Online datasheet", ComponentLink1URL=https://datasheet.lcsc.com/szlcsc/Bourne-Semicon-Shenzhen-RCLAMP0521P-N_C316043.pdf, Created By="D Gakure", Manufacturer Part Number=RCLAMP0521P-N, Supplier1=LCSC
D2: "ROHM - RB161MM-20TR - Schottky-Gleichrichterdiode, 20 V, 1 A, Einfach, SOD-123FL, 2 Pin(s), 350 mV"
D2: "DIODE SCHOTTKY 20V 1A SOD123FL", Average Rectified Current=1A, Forward Voltage=340mV, Manufacturer="ON Semiconductor", Max Forward Surge Current (Ifsm)=45A, Max Operating Temperature=125°C, Max Repetitive Reverse Voltage (Vrrm)=20V, Max Reverse Leakage Current=600uA, Min Operating Temperature=-65°C, Package Quantity=10000, Supplier Part Number 1=MBR120VLSFT3GOSCT-ND, Category="Schottky Diodes", ComponentLink4Description="On Semi datasheet online", ComponentLink4URL=https://datasheet.ciiva.com/6380/mbr120vlsft1-d-6380910.pdf, Current Rating=1A, Element Configuration=Single, Forward Current=1A, Halogen Free="Halogen Free", Lead Free="Lead Free", Manufacturer Part Number=MBR120VLSFT3G, Max Reverse Voltage (DC)=20V, Max Surge Current=45A, Number of Pins=2, Output Current=1A, Packaging="Tape and Reel", Peak Non-Repetitive Surge Current=45A, Peak Reverse Current=600uA, Polarity=Standard, Pricing 1="1=0.39000, 10=0.28600, 100=0.19920, 500=0.12616, 1000=0.10292, 2000=0.09960, 5000=0.09628 (USD)", Radiation Hardening=No, REACH SVHC="No SVHC", RoHS=Yes, Stock 1=32481, Supplier 1=Digi-Key, Supplier 2=Mouser, Supplier 3=RSComponents, Supplier Part Number 2=863-MBR120VLSFT3G, Supplier Part Number 3=1867479, Voltage Rating (DC)=20V
D3: "1615 Light Emitting Diodes (LED) RoHS", Manufacturer=TUOZHAN, Package=1615, Supplier 1 Part Number=C779813, Category=Optoelectronics, Checked By=?, ComponentLink1Description="Online datasheet", ComponentLink1URL=https://datasheet.lcsc.com/szlcsc/2009041238_TUOZHAN-TZ-P4-1615RGBTCA1-0-55T_C779813.pdf, Created By="D. Gakure", Manufacturer Part Number=TZ-P4-1615RGBTCA1-0.55T, Packaging="Tape & Reel (TR)", RoHS="RoHS Compliant", Size / Dimension=1.6x1.5mm, Supplier 1=LCSC
D7: "DIODE ARRAY SCHOTTKY 30V SOT23", Manufacturer=Nexperia, Manufacturer Part Number=BAT54S,235, Supplier Part Number 1=1727-1868-1-ND, Category="Rectifier Diodes", ComponentLink1Description="NXP datasheet online", ComponentLink1URL=https://assets.nexperia.com/documents/data-sheet/BAT54_SER.pdf, Pricing 1="1=0.13000, 10=0.11900, 100=0.05610, 500=0.03326, 1000=0.02185, 5000=0.02138 (USD)", RoHS=No, Stock 1=14011, Supplier 1=Digi-Key, Supplier 2=Mouser, Supplier 3=RSComponents, Supplier Part Number 2=771-BAT54S235, Supplier Part Number 3=1707990
D9: library part 19-217/GHC-YR1S2/3T, "LED GREEN DIFFUSED 0603 SMD", Case Code (Imperial)=0603, Color=Green, Manufacturer="Everlight Elec", Supplier 1 Part Number=C72043, Case/Package=0603, Colour=Green, ComponentLink1Description="Online datasheet", ComponentLink1URL=https://datasheet.lcsc.com/lcsc/1811101510_Everlight-Elec-19-217-GHC-YR1S2-3T_C72043.pdf, Manufacturer Part Number=19-217/GHC-YR1S2/3T, Mount="Surface Mount", Supplier 1=LCSC
FB1: "0603 1k@100MHz 0.8A chip", Case Code (Imperial)=0603, Case Code (Metric)=1608, Current Rating=800mA, DC Resistance (DCR)=300mR, Manufacturer=TDK, Manufacturer Part Number=MPZ1608S102ATA00, Package Quantity=4000, Supplier Part Number 1=445-8694-1-ND, Tolerance=25%, Case/Package=0603, ComponentLink2Description="datasheet online", ComponentLink2URL=https://www.mouser.co.uk/datasheet/2/400/eads_commercial_power_mpz1608_en-923650.pdf, ComponentLink3Description=datasheet, ComponentLink3URL="Y:\System\Altium\Libraries 2014\TDK\Datasheets\eads_commercial_power_mpz1608_en-923650.pdf", Core Material=Ferrite, Height=0.037inch, Impedance="1kR @ 100MHz", Length=0.063inch, Max DC Current=800mA, Mount="Surface Mount", Packaging="Tape and Reel", Pricing 1="1=0.1, 10=0.079, 25=0.0716, 50=0.0644, 100=0.0472, 250=0.03432, 500=0.03146, 1000=0.02717 (USD)", Stock 1=113542, Supplier 1=Digi-Key, Supplier 2=Mouser, Supplier Part Number 2=810-MPZ1608S102ATA00, Width=0.031inch
J1: "Open solder blob"
J2: "USB - Type C Female 16 USB Connectors RoHS", Manufacturer="Korean Hroparts Elec", Supplier 1 Part Number=C165948, Category="USB Connectors", ComponentLink1Description="Online datasheet", ComponentLink1URL=https://datasheet.lcsc.com/szlcsc/1811131825_Korean-Hroparts-Elec-TYPE-C-31-M-12_C165948.pdf, Gender=Receptacle, Manufacturer Part Number=TYPE-C-31-M-12, Number of Positions=16, Orientation="Right Angle", RoHS=Yes, Supplier 1=LCSC
J3 J6 J7 J8: library part "Jacdac edge connector", "3 pin jacdac edge connector 1.27mm pitch", Manufacturer Part Number=JACDAC_EDGE_CONNECTOR, Checked By=?, ComponentLink1Description="Yuliang JACDAC cable connector drawing online", ComponentLink1URL=https://github.com/microsoft/jacdac-mdk/blob/main/connector/JACDAC-Connector-by-Yuliang-2020-11-28.pdf, ComponentLink2Description="JACDAC PCB edge connector spec onlin", ComponentLink2URL=https://github.com/microsoft/jacdac-mdk/blob/main/connector/JACDAC_PCB_Edge_Connector_Drawing_JD-PEC-01_rev_01.pdf, Created By="D. Gakure", PCB Type="1.6mm FR4"
J4: library part UART_HACK_CONNECT_MINI
J5: library part JTAG_HACK_CONNECT
J9: "Header Male Pin 0.039\"(1.00mm) 4 SMD,P=1mm Wire To Board / Wire To Wire Connector RoHS"
J9: "CONN HEADER SMD R/A 4POS 1MM", Color=Natural, Contact Resistance=40mR, Housing Color=Beige, Manufacturer=JST, Max Current Rating=1A, Max Operating Temperature=85°C, Max Voltage Rating (AC)=50V, Min Operating Temperature=-25°C, Supplier Part Number 1=455-1804-1-ND, Category=Connectors, ComponentLink1Description="Online datasheet", ComponentLink1URL=https://datasheet.ciiva.com/26894/getdatasheetpartid-499363-26894945.pdf?src-supplier=Verical, Connector Type="Male Pin", Contact Material="Copper Alloy", Contact Plating=Tin,Copper, Depth=4.95mm, Housing Material=Polyamide, Lead Free="Lead Free", Length=6mm, Manufacturer Part Number=SM04B-SRSS-TB(LF)(SN), Max Voltage Rating (DC)=50V, Mount="Surface Mount", Number of Contacts=4, Number of Positions=4, Number of Rows=1, Orientation="Right Angle", Packaging="Tape and Reel", Pitch=0.039inch, Pricing 1="1=0.55000, 10=0.51700, 100=0.39640, 500=0.34468, 1000=0.28436 (USD)", Pricing 2="10=0.42800, 100=0.32800, 500=0.28500, 1000=0.23600, 2500=0.23100 (GBP)", Pricing 3="3000=0.36000, 6000=0.29000 (USD)", Pricing 4="1=0.67900, 10=0.63700, 25=0.54900, 50=0.49500, 100=0.46200, 250=0.41000, 500=0.39800, 1000=0.36200 (USD)", RoHS=Yes, Stock 2=8030, Stock 3=9000, Stock 4=10006, Supplier 1=Digi-Key, Supplier 2=Farnell, Supplier 3="Future Electronics", Supplier 4=Newark, Supplier Part Number 2=1830839, Supplier Part Number 3=4517173, Supplier Part Number 4=87R0314, Termination=Solder
MH1 MH2 MH3 MH4: "Mounting Hole 5.0mm keepout, 3.0mm annualar ring and 2.1mm Drill PTH"
Q1 Q2: "Trans MOSFET N-CH Si 60V 0.3A 3-Pin SOT-23 T/R", Case/Package=SOT-23, Continuous Drain Current (ID)=300mA, Drain to Source Breakdown Voltage=60V, Drain to Source Resistance=2R, Gate to Source Voltage (Vgs)=20V, Input Capacitance=30pF, Manufacturer=Vishay, Max Operating Temperature=150°C, Max Power Dissipation=350mW, Min Operating Temperature=-55°C, Package Quantity=1, Supplier Part Number 1=2N7002K-T1-GE3CT-ND, Threshold Voltage=1V, Category=MOSFETs, ComponentLink1Description="Online datasheet", ComponentLink1URL=https://datasheet.ciiva.com/2957/2n7002k-2957216.pdf, Contact Plating=Tin,Matte, Drain to Source Voltage (Vdss)=60V, Element Configuration=Single, Height=1.02mm, Lead Free="Lead Free", Length=3.04mm, Manufacturer Part Number=2N7002K-T1-GE3, Mount="Surface Mount", Nominal Vgs=2V, Number of Channels=1, Number of Elements=1, Number of Pins=3, On-State Resistance=2R, Packaging="Tape and Reel", Power Dissipation=350mW, Pricing 1="1=0.27000, 10=0.21800, 25=0.18200, 100=0.11540, 500=0.07590, 1000=0.05161 (USD)", Pricing 2="100=0.11100 (USD)", Radiation Hardening=No, Rds On Max=2R, REACH SVHC=Unknown, RoHS=Yes, Stock 2=1, Supplier 1=Digi-Key, Supplier 2=RSComponents, Supplier Part Number 2=7879058P, Turn-Off Delay Time=35ns, Turn-On Delay Time=25ns, Voltage=60V, Weight=0.050717oz, Width=1.4mm
R1: "RES SMD 330K OHM 1% 1/16W 0402", Case Code (Imperial)=0402, Case Code (Metric)=1005, Manufacturer=Yageo, Max Operating Temperature=155°C, Max Power Dissipation=63mW, Min Operating Temperature=-55°C, Package Quantity=1, Resistance=330kR, Resistance Tolerance=1%, Resistor Type="Thick Film", Supplier Part Number 1=311-330KLRCT-ND, Temperature Coefficient=100ppm/°C, Voltage Rating=50V, Case/Package=0402, Category="Chip SMD Resistors", Checked By=?, ComponentLink1Description="Online datasheet", ComponentLink1URL=https://datasheet.ciiva.com/2518/pyu-r-int-thick-7-2518994.pdf?src-supplier=Digi-Key, Construction=Rectangular, Created By="D Gakure", Depth=0.5mm, Features="Moisture Resistant", Height=0.016inch, Lead Free="Lead Free", Length=1mm, Manufacturer Part Number=RC0402FR-07330KL, Military Standard=Not, Number of Terminations=2, Packaging="Tape and Reel", Power Rating=63mW, Pricing 1="1=0.10000, 10=0.01600, 100=0.00660, 1000=0.00299, 2500=0.00259, 5000=0.00214 (USD)", Pricing 2="1=0.10000, 10=0.01400, 50=0.01400, 100=0.00500, 1000=0.00300, 10000=0.00200 (USD)", Pricing 3="10=0.01210, 100=0.00460, 500=0.00410, 2500=0.00310, 5000=0.00280, 10000=0.00250, 50000=0.00180 (GBP)", REACH SVHC=Unknown, RoHS=Yes, RoHS Compliant=Yes, Series=RC, Size Code=0402, Stock 1=78809, Stock 2=218637, Stock 3=310234, Supplier 1=Digi-Key, Supplier 2=Mouser, Supplier 3=Farnell, Supplier Part Number 2=603-RC0402FR-07330KL, Supplier Part Number 3=9239537, Termination=SMD/SMT, Tolerance=1%, Width=0.02inch
R2 R7: library part RC0402FR-071ML, "RES SMD 1M OHM 1% 1/16W 0402", Case Code (Imperial)=0402, Case Code (Metric)=1005, Manufacturer=Yageo, Max Operating Temperature=155°C, Max Power Dissipation=63mW, Min Operating Temperature=-55°C, Resistance=1MR, Resistance Tolerance=1%, Resistor Type="Thick Film", Supplier Part Number 1=311-1.00MLRCT-ND, Temperature Coefficient=100ppm/°C, Voltage Rating=50V, Case/Package=0402, Category="Chip SMD Resistors", Checked By=?, ComponentLink1Description="Online datasheet", ComponentLink1URL=https://datasheet.ciiva.com/11808/0900766b80c66297-11808125.pdf, Construction=Rectangular, Created By="D. Gakure", Depth=0.5mm, Features="Moisture Resistant", Height=0.32mm, Lead Free="Lead Free", Length=1mm, Manufacturer Part Number=RC0402FR-071ML, Military Standard=Not, Number of Terminations=2, Packaging="Tape and Reel", Power Rating=63mW, Pricing 1="1=0.10000, 10=0.01600, 100=0.00640, 1000=0.00286, 2500=0.00248, 5000=0.00205 (USD)", Pricing 2="1=0.10000, 10=0.01200, 50=0.01200, 100=0.00400, 1000=0.00400, 10000=0.00300 (USD)", Pricing 3="10000=0.00290, 50000=0.00200 (GBP)", REACH SVHC=Unknown, RoHS=Yes, RoHS Compliant=Yes, Series=RC, Size Code=0402, Stock 1=7856490, Stock 2=1194490, Stock 3=1530000, Supplier 1=Digi-Key, Supplier 2=Mouser, Supplier 3=Farnell, Supplier Part Number 2=603-RC0402FR-071ML, Supplier Part Number 3=2421892, Technology="THICK FILM", Termination=SMD/SMT, Tolerance=1%
R3 R4: "RES SMD 5.1K OHM 5% 1/16W 0402", Case Code (Imperial)=0402, Case Code (Metric)=1005, Manufacturer=Yageo, Max Operating Temperature=155°C, Max Power Dissipation=63mW, Min Operating Temperature=-55°C, Power Rating=62.5mW, Resistance=5.1kR, Resistance Tolerance=5%, Resistor Type="Thick Film", Supplier Part Number 1=311-5.1KJRCT-ND, Temperature Coefficient=100ppm/°C, Voltage Rating=50V, Case/Package=0402, Category="Chip SMD Resistors", Checked By=?, ComponentLink2Description="Onnline datasheet", ComponentLink2URL=https://datasheet.ciiva.com/16740/pyu-rc0402-51-rohs-l-6-r-16740925.pdf, Construction=Rectangular, Created By="D. Gakure", Depth=0.5mm, Features="Moisture Resistant", Height=0.35mm, Lead Free="Lead Free", Length=1mm, Manufacturer Part Number=RC0402JR-075K1L, Military Standard=Not, Number of Terminations=2, Packaging="Tape and Reel", Pricing 1="1=0.10000, 10=0.01300, 100=0.00520, 1000=0.00233, 2500=0.00202, 5000=0.00167 (USD)", Pricing 2="1=0.10000, 25=0.01000, 100=0.00400, 250=0.00400, 500=0.00300, 1000=0.00300 (USD)", Pricing 3="1=0.10000, 10=0.01000, 50=0.01000, 100=0.00400, 1000=0.00300, 10000=0.00200 (USD)", Pricing 4="10=0.00910, 100=0.00390, 500=0.00320, 2500=0.00240, 5000=0.00210, 10000=0.00190, 50000=0.00150 (GBP)", Pricing 5="10000=0.00270 (GBP)", REACH SVHC="No SVHC", RoHS=Yes, RoHS Compliant=Yes, Series=RC, Size Code=0402, Stock 1=1270619, Stock 2=1265, Stock 3=100817, Stock 4=68890, Stock 5=1265, Supplier 1=Digi-Key, Supplier 2=Newark, Supplier 3=Mouser, Supplier 4=Farnell, Supplier 5=Farnell, Supplier Part Number 2=68R0016, Supplier Part Number 3=603-RC0402JR-075K1L, Supplier Part Number 4=3495714, Supplier Part Number 5=1799293, Termination=SMD/SMT, Tolerance=5%, Voltage Rating (DC)=50V, Weight=2.3E-05oz, Width=0.5mm
R5: "RES SMD 68K OHM 1% 1/16W 0402", Case Code (Imperial)=0402, Case Code (Metric)=1005, Manufacturer=Yageo, Max Operating Temperature=125°C, Max Power Dissipation=63mW, Min Operating Temperature=-55°C, Package Quantity=10000, Power Rating=62.5mW, Resistance=68kR, Resistor Type="Thin Film", Supplier Part Number 1=13-RT0402FRE0768KLCT-ND, Temperature Coefficient=50ppm/°C, Tolerance=1%, Voltage Rating=50V, Case/Package=0402, Category="Chip SMD Resistors", Checked By=?, ComponentLink1Description="Online datasheet", ComponentLink1URL=https://datasheet.ciiva.com/2561/pyu-rt-1-to-0-05-rohs-l-5-2561824.pdf?src-supplier=Digi-Key, Contact Plating=Tin,Matte, Created By="D. Gakure", Height=0.014inch, Lead Free="Lead Free", Length=0.039inch, Manufacturer Part Number=RT0402FRE0768KL, Number of Terminations=2, Packaging="Tape and Reel", Pricing 1="1=0.10000, 10=0.07000, 100=0.02830, 1000=0.01272, 2500=0.01104, 5000=0.00912 (USD)", Pricing 2="1=0.24000, 10=0.05600, 50=0.05600, 100=0.01900, 1000=0.01400, 10000=0.00800 (USD)", Radiation Hardening=No, RoHS=Yes, RoHS Compliant=Yes, Series=RT, Stock 1=19319, Stock 2=28756, Supplier 1=Digi-Key, Supplier 2=Mouser, Supplier Part Number 2=603-RT0402FRE0768KL, Termination=SMD/SMT, Voltage Rating (DC)=50V, Width=0.02inch
R6: "RES SMD 52.3K OHM 1% 1/16W 0402", Case Code (Imperial)=0402, Case Code (Metric)=1005, Manufacturer=Yageo, Max Operating Temperature=155°C, Max Power Dissipation=63mW, Min Operating Temperature=-55°C, Power Rating=62.5mW, Resistance=52.3kR, Resistor Type="Thick Film", Supplier Part Number 1=YAG3179CT-ND, Temperature Coefficient=100ppm/°C, Tolerance=1%, Voltage Rating=50V, Case/Package=0402, Category="Chip SMD Resistors", Checked By=?, ComponentLink1Description="Oline datasheet", ComponentLink1URL=https://datasheet.ciiva.com/16867/pyu-rc0402-51-rohs-l-6-16867930.pdf, Construction=Rectangular, Contact Plating=Tin,Matte, Created By="D. Gakure", Depth=0.5mm, Features="Moisture Resistant", Height=0.016inch, Lead Free="Lead Free", Length=1mm, Manufacturer Part Number=RC0402FR-0752K3L, Military Standard=Not, Number of Terminations=2, Packaging="Tape and Reel", Pricing 1="1=0.10000, 10=0.01600, 100=0.00640, 1000=0.00286, 2500=0.00248, 5000=0.00205 (USD)", Pricing 2="1=0.10000, 10=0.01200, 50=0.01200, 100=0.00400, 1000=0.00300, 10000=0.00300 (USD)", RoHS=Yes, RoHS Compliant=Yes, Series=RC, Size Code=0402, Stock 1=1178310, Stock 2=83620, Supplier 1=Digi-Key, Supplier 2=Mouser, Supplier Part Number 2=603-RC0402FR-0752K3L, Termination=SMD/SMT, Voltage Rating (DC)=50V, Weight=2.3E-05oz, Width=0.02inch
R8 R9: "RES SMD 30 OHM 1% 1/16W 0402", Case Code (Imperial)=0402, Case Code (Metric)=1005, Manufacturer="UNI-ROYAL(Uniroyal Elec)", Resistance=30R, Supplier 1 Part Number=C270617, Tolerance=1%, Case/Package=0402, Category="Chip SMD Resistors", ComponentLink1Description="Online datasheet", ComponentLink1URL=https://datasheet.lcsc.com/lcsc/1810301129_UNI-ROYAL-Uniroyal-Elec-0402WGF300JTCE_C270617.pdf, Manufacturer Part Number=0402WGF300JTCE, Supplier 1=LCSC
R10 R13 R15: "RES SMD 150 OHM 1% 1/16W 0402", Case Code (Imperial)=0402, Case Code (Metric)=1005, Manufacturer=Yageo, Max Operating Temperature=155°C, Max Power Dissipation=63mW, Min Operating Temperature=-55°C, Package Quantity=1, Power Rating=62.5mW, Resistance=150R, Resistance Tolerance=1%, Resistor Type="Thick Film", Supplier Part Number 1=311-150LRCT-ND, Temperature Coefficient=100ppm/°C, Voltage Rating=50V, Case/Package=0402, Category="Chip SMD Resistors", Checked By=?, ComponentLink1Description="ine datasheet", ComponentLink1URL=https://datasheet.ciiva.com/11808/0900766b80c66297-11808422.pdf, Construction=Rectangular, Created By="D. Gakure", Depth=0.5mm, Features="Moisture Resistant", Height=0.016inch, Lead Free="Lead Free", Length=1mm, Manufacturer Part Number=RC0402FR-07150RL, Military Standard=Not, Number of Terminations=2, Packaging="Tape and Reel", Pricing 1="1=0.10000, 10=0.01400, 100=0.00580, 1000=0.00260, 2500=0.00226, 5000=0.00186 (USD)", Pricing 2="1=0.10000, 10=0.01200, 50=0.01200, 100=0.00400, 1000=0.00400, 10000=0.00300 (USD)", Pricing 3="10000=0.00270, 50000=0.00200 (GBP)", REACH SVHC="No SVHC", RoHS=Yes, RoHS Compliant=Yes, Series=RC, Stock 1=5214533, Stock 2=582717, Stock 3=880000, Supplier 1=Digi-Key, Supplier 2=Mouser, Supplier 3=Farnell, Supplier Part Number 2=603-RC0402FR-07150RL, Supplier Part Number 3=2421893, Technology="THICK FILM", Termination=SMD/SMT, Tolerance=1%, Width=0.02inch, Working Voltage=50V
R11 R17: library part RC0402FR-0710KL, "RES SMD 10K OHM 1% 1/16W 0402", Case Code (Imperial)=0402, Case Code (Metric)=1005, Manufacturer=Yageo, Max Operating Temperature=155°C, Min Operating Temperature=-55°C, Power Rating=62.5mW, Resistance=10kR, Resistor Type="Thick Film", Supplier Part Number 1=311-10.0KLRCT-ND, Temperature Coefficient=100ppm/°C, Tolerance=1%, Voltage Rating=50V, Case/Package=0402, Category=Resistors, Checked=?, ComponentLink1Description=https://datasheet.ciiva.com/7660/38568-7660787.pdf?src-supplier=Element14, ComponentLink1URL=https://datasheet.ciiva.com/7660/38568-7660787.pdf?src-supplier=Element14, ComponentLink2Description=https://datasheet.ciiva.com/7849/1784430-7849813.pdf?src-supplier=Element14, ComponentLink2URL=https://datasheet.ciiva.com/7849/1784430-7849813.pdf?src-supplier=Element14, ComponentLink3Description=https://datasheet.ciiva.com/7849/1686128-7849814.pdf?src-supplier=Element14, ComponentLink3URL=https://datasheet.ciiva.com/7849/1686128-7849814.pdf?src-supplier=Element14, ComponentLink4Description=https://datasheet.ciiva.com/7849/1784430-7849815.pdf?src-supplier=Element14, ComponentLink4URL=https://datasheet.ciiva.com/7849/1784430-7849815.pdf?src-supplier=Element14, ComponentLink5Description=https://datasheet.ciiva.com/22747/1018594-22747512.pdf?src-supplier=Element14, ComponentLink5URL=https://datasheet.ciiva.com/22747/1018594-22747512.pdf?src-supplier=Element14, ComponentLink6Description=https://datasheet.ciiva.com/12667/pyu-rc0402-51-rohs-l-6-r-12667067.pdf?src-supplier=Mouser, ComponentLink6URL=https://datasheet.ciiva.com/12667/pyu-rc0402-51-rohs-l-6-r-12667067.pdf?src-supplier=Mouser, ComponentLink7Description=https://datasheet.ciiva.com/7983/1018594-7983486.pdf?src-supplier=Element14, ComponentLink7URL=https://datasheet.ciiva.com/7983/1018594-7983486.pdf?src-supplier=Element14, Created=DG, Depth=0.5mm, Height=0.32mm, Lead Free="Lead Free", Lead Pitch=0.2mm, Length=1mm, Manufacturer Part Number=RC0402FR-0710KL, Military Standard=Not, Number of Pins=2, Number of Terminations=2, Packaging="Tape and Reel", Pricing 1="1=0.10000, 10=0.01400, 100=0.00580, 1000=0.00262, 2500=0.00228, 5000=0.00188 (USD)", Pricing 2="1=0.10000, 10=0.01300, 100=0.00400, 1000=0.00300, 2500=0.00300, 10000=0.00200 (USD)", Pricing 3="10000=0.00350 (GBP)", REACH SVHC="No SVHC", RoHS=Yes, Stock 1=40173593, Stock 2=23672167, Stock 3=370000, Supplier 1=Digi-Key, Supplier 2=Mouser, Supplier 3=Farnell, Supplier Part Number 2=603-RC0402FR-0710KL, Supplier Part Number 3=2363463, Termination=SMD/SMT, Voltage Rating (DC)=50V, Width=0.5mm, Working Voltage=50V
R12 R16: "RES SMD 0 OHM JUMPER 1/16W 0402", Case Code (Imperial)=0402, Case Code (Metric)=1005, Manufacturer=Yageo, Max Operating Temperature=155°C, Max Power Dissipation=63mW, Min Operating Temperature=-55°C, Package Quantity=1, Power Rating=62.5mW, Resistance=0mR, Resistor Type="Thick Film", Supplier Part Number 1=311-0.0JRCT-ND, Temperature Coefficient=200ppm/°C, Tolerance=5%, Voltage Rating=50V, Case/Package=0402, Category=Resistors, Checked=?, ComponentLink1Description="Online datasheet", ComponentLink1URL=https://datasheet.ciiva.com/2452/pyu-rc0402-51-rohs-l-6-2452608.pdf, Contact Plating=Tin,Matte, Created=DG, Depth=0.5mm, Features="Moisture Resistant", Height=0.016inch, Lead Free="Lead Free", Length=1mm, Manufacturer Part Number=RC0402JR-070RL, Military Standard=Not, Number of Terminations=2, Packaging="Tape and Reel", Pricing 1="1=0.10000, 10=0.01200, 25=0.00840, 50=0.00640, 100=0.00480, 250=0.00364, 500=0.00292, 1000=0.00215, 5000=0.00154 (USD)", Pricing 2="1=0.10000, 10=0.01000, 100=0.00400, 1000=0.00300, 2500=0.00200, 10000=0.00200 (USD)", Pricing 3="10000=0.00120, 50000=0.00100, 200000=0.00100, 500000=0.00100, 1250000=0.00100 (USD)", Radiation Hardening=No, REACH SVHC=Unknown, RoHS=Yes, Stock 1=40652479, Stock 2=8807711, Stock 3=29070000, Supplier 1=Digi-Key, Supplier 2=Mouser, Supplier 3="Future Electronics", Supplier Part Number 2=603-RC0402JR-070RL, Supplier Part Number 3=3375797, Termination=SMD/SMT, Width=0.02inch
R14: "RES SMD 220 OHM 1% 1/16W 0402", Case Code (Imperial)=0402, Case Code (Metric)=1005, Manufacturer=Yageo, Max Operating Temperature=155°C, Max Power Dissipation=63mW, Min Operating Temperature=-55°C, Package Quantity=1, Power Rating=62.5mW, Resistance=220R, Resistor Type="Thick Film", Supplier Part Number 1=311-220LRCT-ND, Temperature Coefficient=100ppm/°C, Tolerance=1%, Voltage Rating=50V, Case/Package=0402, Category=Resistors, Checked=?, ComponentLink1Description="Online datasheet", ComponentLink1URL=https://datasheet.ciiva.com/11819/0900766b80c66297-11819466.pdf, Created=D.G, Depth=0.5mm, Features="Moisture Resistant", Height=0.016inch, Lead Free="Lead Free", Length=1mm, Manufacturer Part Number=RC0402FR-07220RL, Military Standard=Not, Number of Pins=2, Number of Terminations=2, Packaging="Tape and Reel", Pricing 1="1=0.10000, 10=0.01400, 100=0.00580, 1000=0.00262, 2500=0.00228, 5000=0.00188 (USD)", Pricing 2="1=0.10000, 10=0.01200, 100=0.00400, 1000=0.00400, 2500=0.00400, 10000=0.00300 (USD)", Pricing 3="1=0.08130, 25=0.01210, 100=0.01120, 250=0.01030, 500=0.00900 (GBP)", REACH SVHC="No SVHC", RoHS=Yes, Stock 1=1286042, Stock 2=324625, Stock 3=18234, Supplier 1=Digi-Key, Supplier 2=Mouser, Supplier 3=Farnell, Supplier Part Number 2=603-RC0402FR-07220RL, Supplier Part Number 3=2147864, Termination=SMD/SMT, Voltage Rating (DC)=50V, Width=0.02inch
R18 R19: "RES SMD 2.2K OHM 1% 1/16W 0402", Case Code (Imperial)=0402, Case Code (Metric)=1005, Manufacturer=Yageo, Max Operating Temperature=155°C, Min Operating Temperature=-55°C, Power Rating=63mW, Resistance=2.2kR, Resistor Type="Thick Film", Supplier Part Number 1=311-2.20KLRCT-ND, Temperature Coefficient=100ppm/°C, Tolerance=1%, Voltage Rating=50V, by=?, Case/Package=0402, Category=Resistors, ComponentLink1Description="Online datasheet", ComponentLink1URL=https://datasheet.ciiva.com/11808/0900766b80c66297-11808786.pdf, Created By="D. Gakure", Depth=0.5mm, Height=0.35mm, Lead Free="Lead Free", Length=1mm, Manufacturer Part Number=RC0402FR-072K2L, Military Standard=Not, Packaging="Tape and Reel", Pricing 1="1=0.10000, 10=0.01400, 100=0.00580, 1000=0.00262, 2500=0.00228, 5000=0.00188 (USD)", Pricing 2="1=0.10000, 10=0.01200, 100=0.00400, 1000=0.00400, 2500=0.00400, 10000=0.00300 (USD)", Pricing 3="10=0.01350, 100=0.01190, 500=0.01020, 2500=0.00460, 5000=0.00420, 10000=0.00370, 50000=0.00240 (GBP)", REACH SVHC=Unknown, RoHS=Yes, Stock 1=6492087, Stock 2=1171407, Stock 3=428944, Supplier 1=Digi-Key, Supplier 2=Mouser, Supplier 3=Farnell, Supplier Part Number 2=603-RC0402FR-072K2L, Supplier Part Number 3=9239278, Termination=SMD/SMT, Weight=2.3E-05oz, Width=0.5mm